# Altium PCB STC89C52RC-40贴片_2021-12-16.pcbdoc
Units mm, origin at the board's own origin, x right, y up, seen from the top; angles counter-clockwise.
Board outline 40.2 x 38.55 mm, 2 copper layers (Top Layer, Bottom Layer); 1 components, 0 nets, 44 pads, 0 vias.
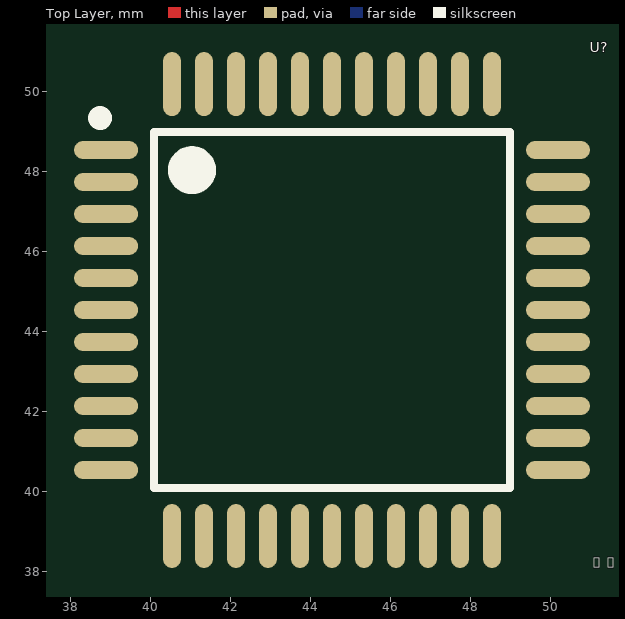
[diagram p0: Top Layer view]
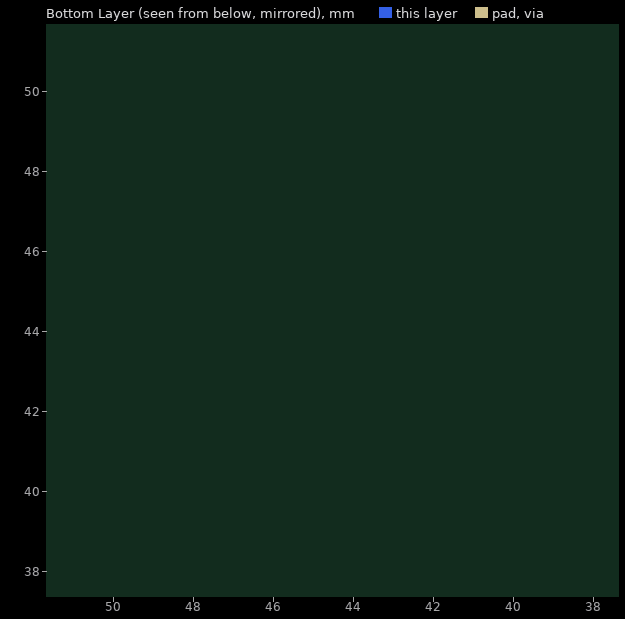
[diagram p1: Bottom Layer view, seen from below]

## Layer stack, top to bottom
Top Layer: signal copper (thickness not stored)
Dielectric: dielectric 0.32, FR-4, Dk 4.8
Bottom Layer: signal copper (thickness not stored)

## Board outline
65.603,25.4 25.4,25.4 25.4,63.952 65.603,63.952

## Components (designator, comment, footprint, x,y, rotation, side; value= is the part's Value field where it differs from the comment)
U? "STC89C52RC-40贴片" STC89C52RC-40贴片 44.549,44.549 r0 top

## Footprints (in the part's own frame and the unit in brackets; to place one, negate y for a bottom-side part, rotate by r counter-clockwise, add the part's x,y. Pads: shape width x height; smd on the part's side, far side on the other; paste and mask are expansions set on the pad)
STC89C52RC-40贴片 [mm]
  oval 1.6x0.45 smd: 1(-5.649,4) 2(-5.649,3.2) 3(-5.649,2.4) 4(-5.649,1.6) 5(-5.649,0.8) 6(-5.649,0) 7(-5.649,-0.8) 8(-5.649,-1.6) 9(-5.649,-2.4) 10(-5.649,-3.2) 11(-5.649,-4) 23(5.649,-4) 24(5.649,-3.2) 25(5.649,-2.4) 26(5.649,-1.6) 27(5.649,-0.8) 28(5.649,0) 29(5.649,0.8) 30(5.649,1.6) 31(5.649,2.4) 32(5.649,3.2) 33(5.649,4)
  oval 0.45x1.6 smd: 12(-4,-5.649) 13(-3.2,-5.649) 14(-2.4,-5.649) 15(-1.6,-5.649) 16(-0.8,-5.649) 17(0,-5.649) 18(0.8,-5.649) 19(1.6,-5.649) 20(2.4,-5.649) 21(3.2,-5.649) 22(4,-5.649) 34(4,5.649) 35(3.2,5.649) 36(2.4,5.649) 37(1.6,5.649) 38(0.8,5.649) 39(0,5.649) 40(-0.8,5.649) 41(-1.6,5.649) 42(-2.4,5.649) 43(-3.2,5.649) 44(-4,5.649)
  silkscreen extent -5.95,-4.45 4.45,4.95

## Nets (pads, with @x,y where several pads share a name; then routed paths per layer and width w, separated by ;. In a path a pad name is that pad's centre, name@x,y a point inside that pad or via, vN(x,y) a via of type N, cw(c..) or ccw(c..) an arc to the next point about the centre after c; other vN are vias at no path point)
pads on no net: U?.1 U?.2 U?.3 U?.4 U?.5 U?.6 U?.7 U?.8 U?.9 U?.10 U?.11 U?.12 U?.13 U?.14 U?.15 U?.16 U?.17 U?.18 U?.19 U?.20 U?.21 U?.22 U?.23 U?.24 U?.25 U?.26 U?.27 U?.28 U?.29 U?.30 U?.31 U?.32 U?.33 U?.34 U?.35 U?.36 U?.37 U?.38 U?.39 U?.40 U?.41 U?.42 U?.43 U?.44

## Silkscreen, mask and mechanical layers (free items; w line width, h text height)
Document:
  lines w0.003: 45.476,44.651 45.527,44.701